# Altium PCB 100x100 SMT Breadboard.PcbDoc
Units mm, origin at the board's own origin, x right, y up, seen from the top; angles counter-clockwise.
Board outline 100 x 100 mm, 2 copper layers (Top Layer, Bottom Layer); 144 components, 0 nets, 576 pads, 0 vias.
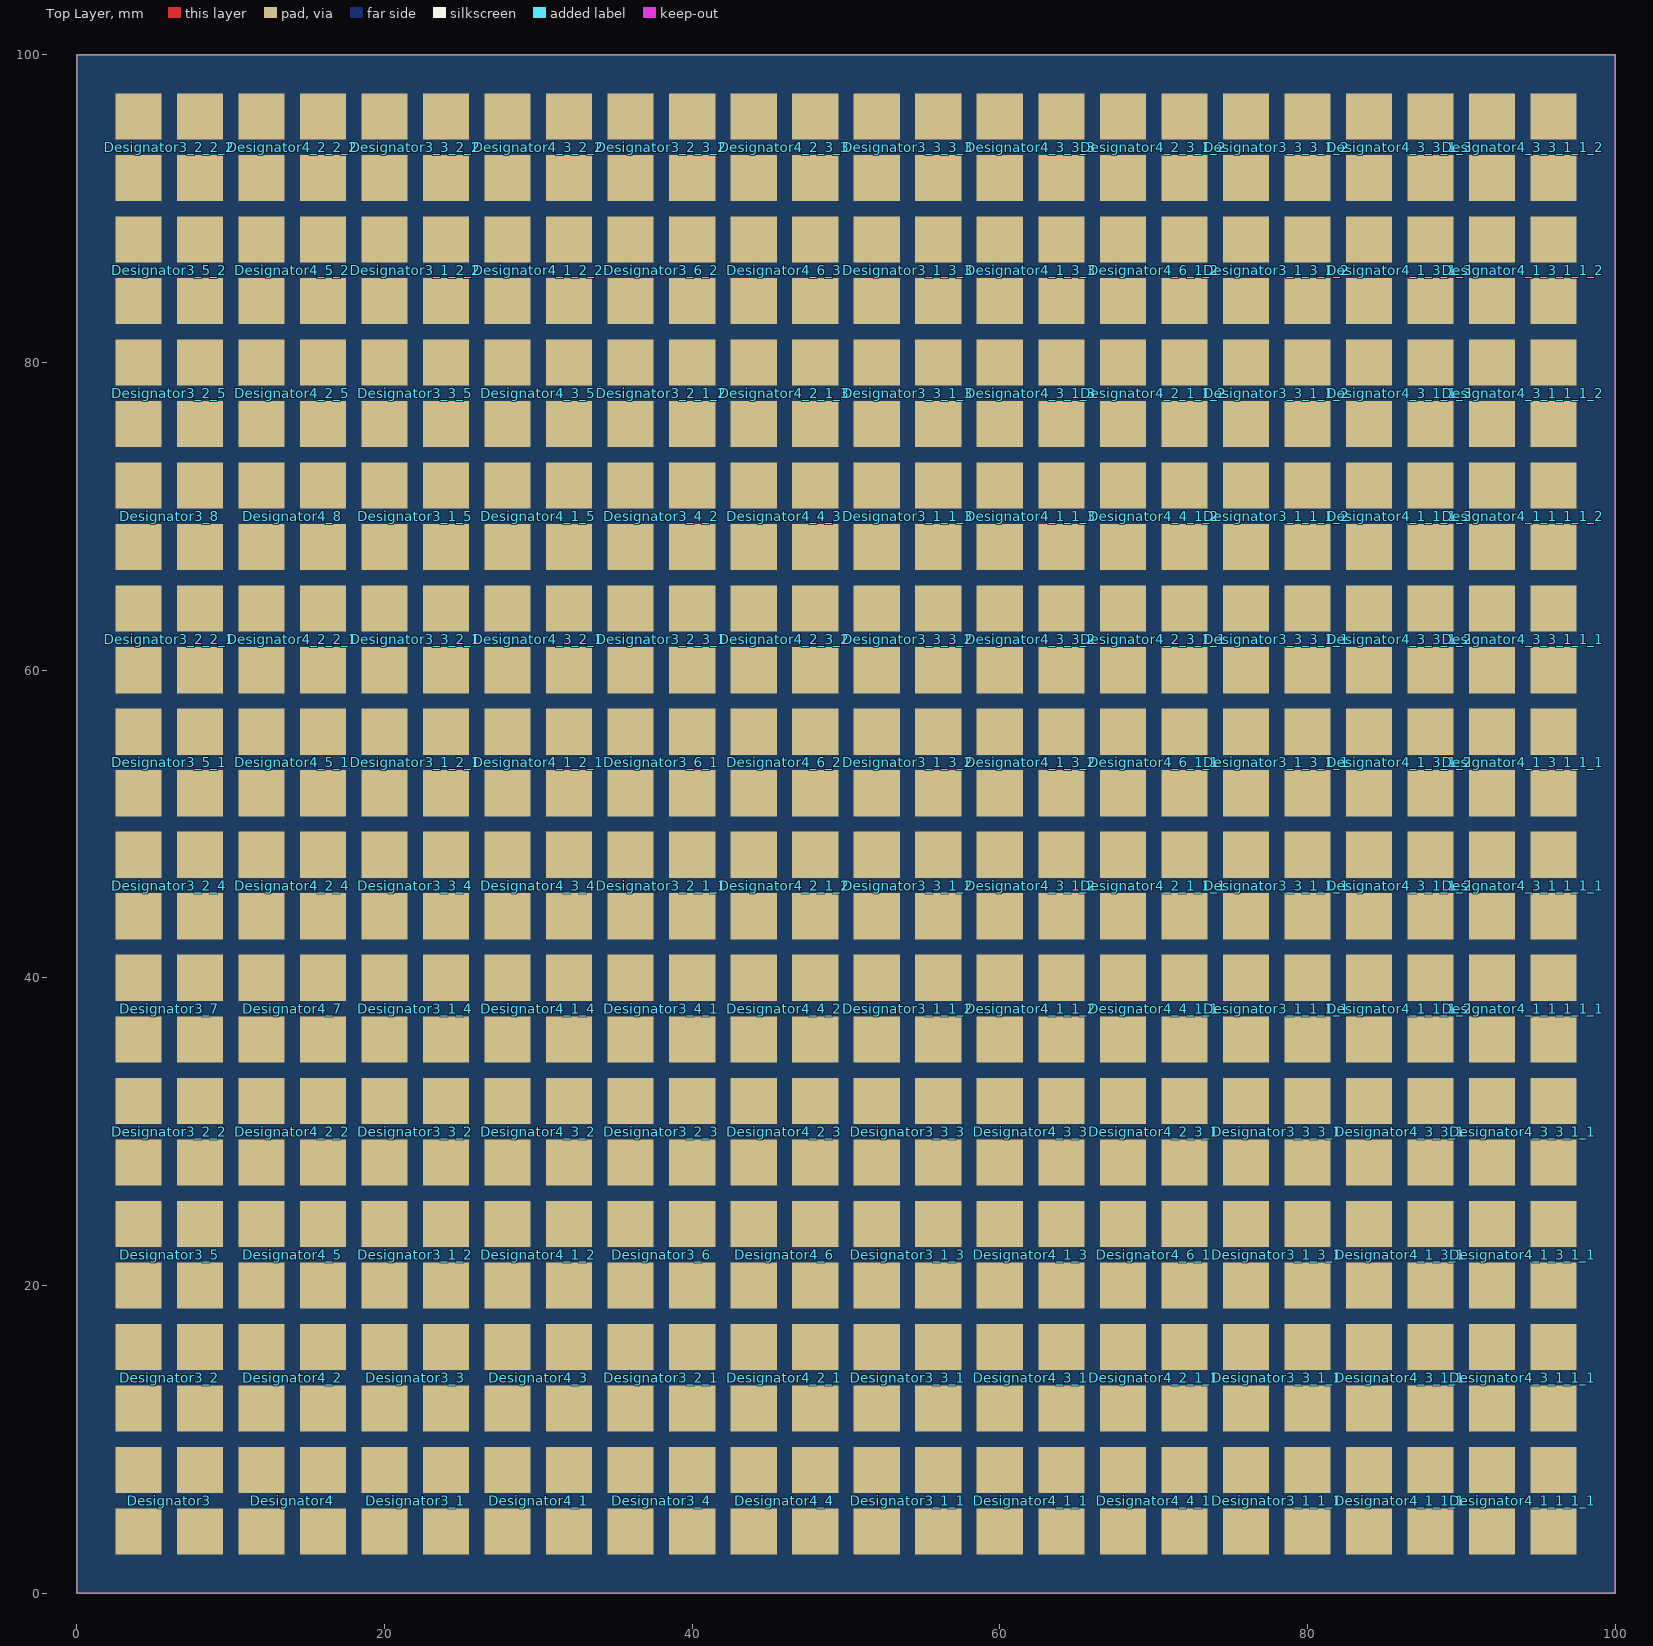
[diagram p0: Top Layer view]
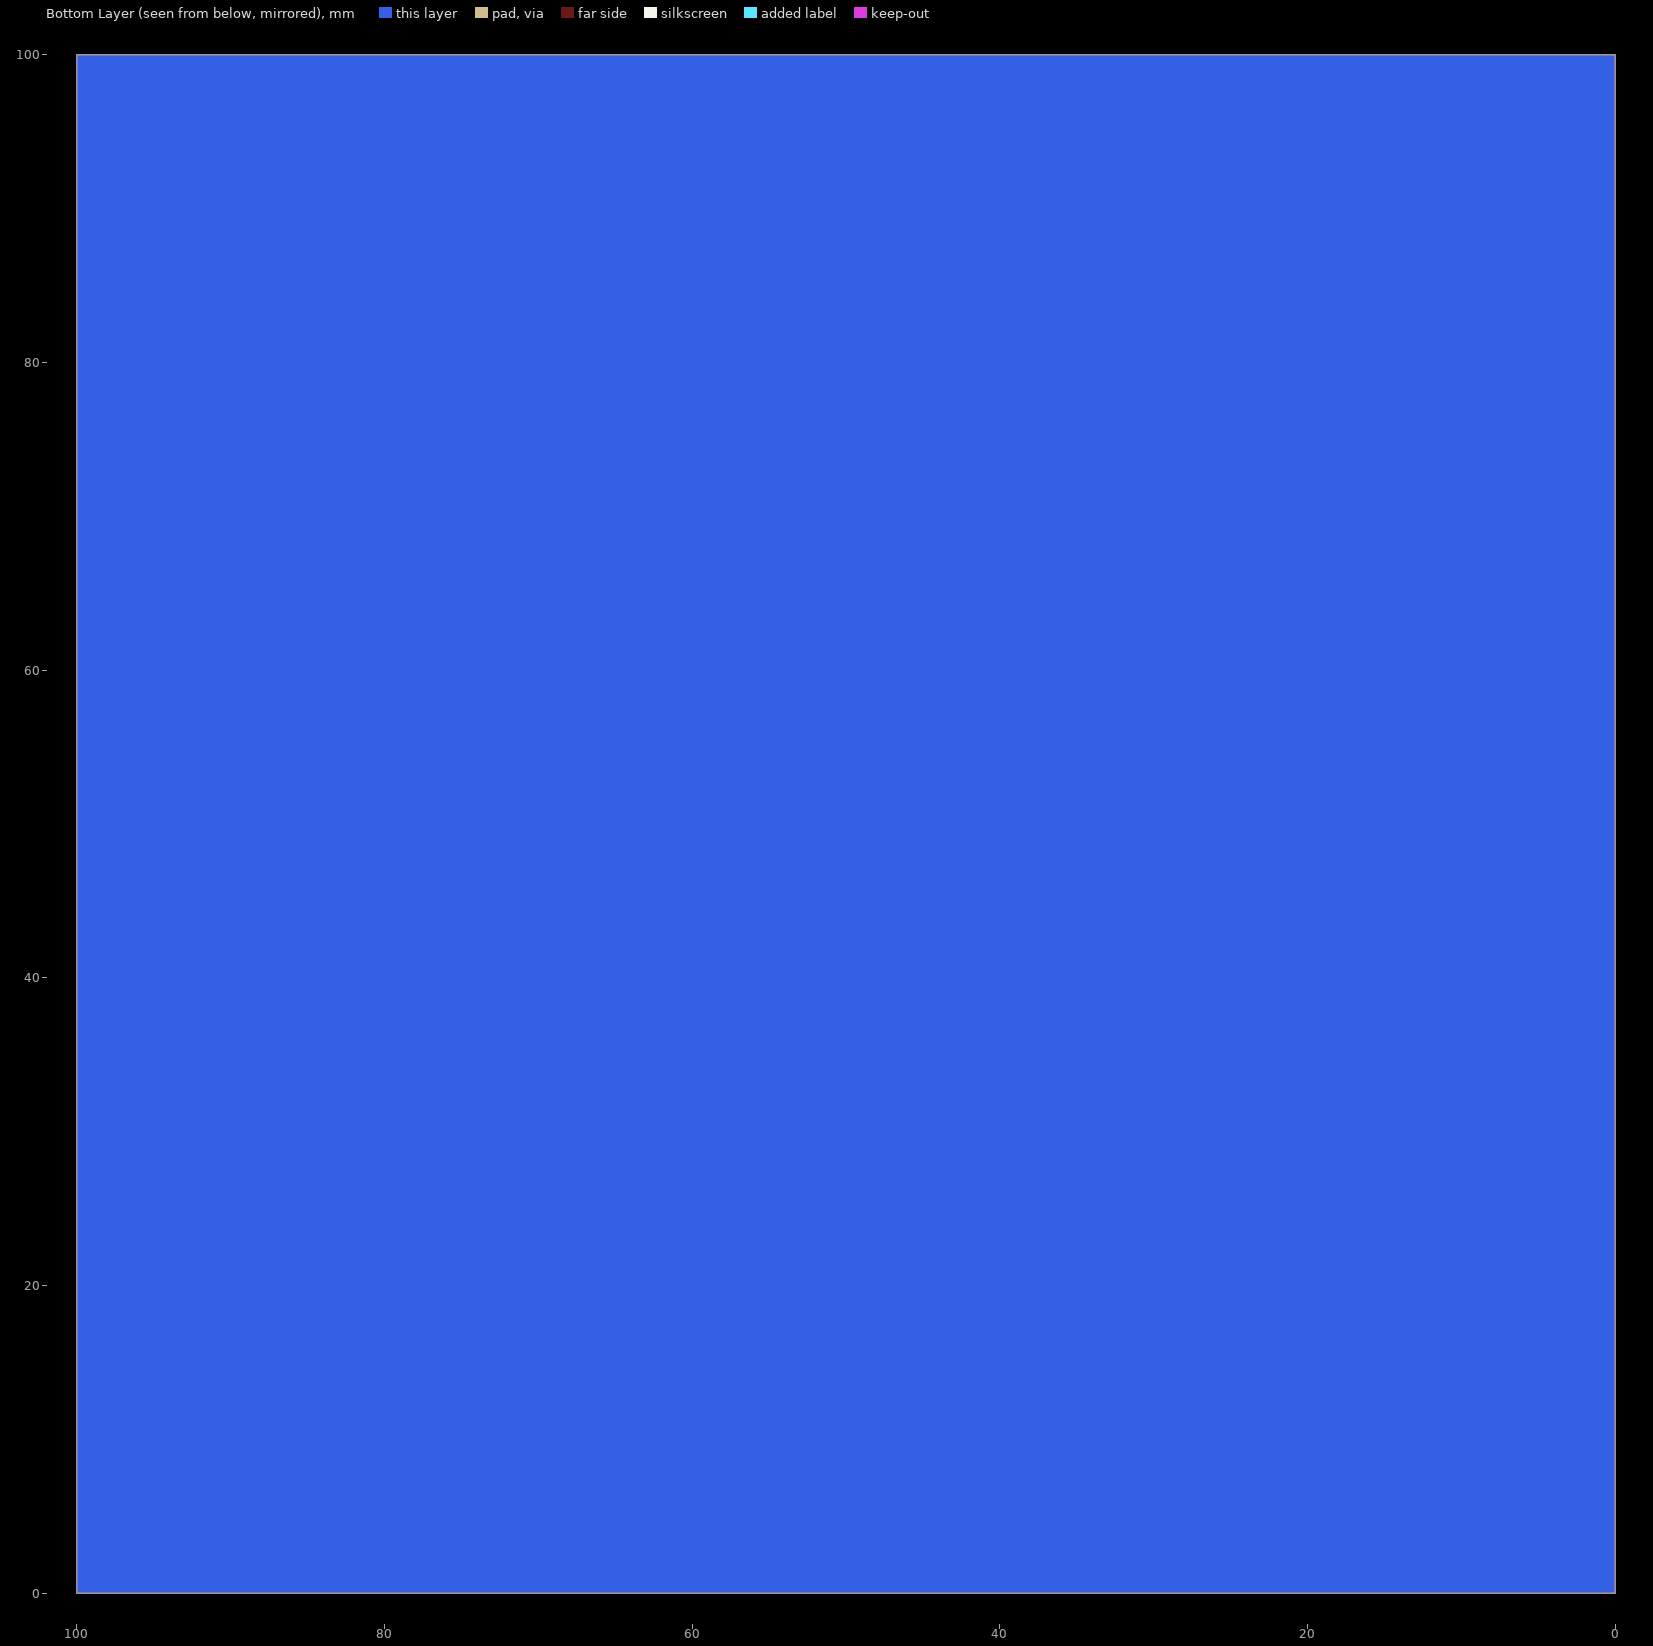
[diagram p1: Bottom Layer view, seen from below]

## Layer stack, top to bottom
Top Solder: solder mask 0.0102, Solder Resist, Dk 3.5
Top Layer: signal copper 0.0356
Dielectric 1: dielectric 0.32, FR-4, Dk 4.8
Bottom Layer: signal copper 0.0356
Bottom Solder: solder mask 0.0102, Solder Resist, Dk 3.5

## Board outline
0,0 100,0 100,100 0,100

## Design rules (kind name [scope] priority, off if disabled: settings)
Clearance [All] p1: gap=0.254
PolygonConnect [All] p1: connectstyle=Relief reliefconductorwidth=0.254 reliefentries=4 polygonreliefangle="90 Angle" airgapwidth=0.254
RoutingVias [All] p1: holewidth=0.711 width=1.27 viastyle="Through Hole" minholewidth=0.711 minwidth=1.27 maxholewidth=0.711 maxwidth=1.27
SolderMaskExpansion [All] p1: expansion=0.102
Width [All] p1: maxlimit=0.254 minlimit=0.254 preferedwidth=0.254
30 further rules are at their usual default settings.

## Components (designator, comment, footprint, x,y, rotation, side; value= is the part's Value field where it differs from the comment)
Designator3 "Comment" "SMD Breadboard" 6,6 r0 top
Designator3_1 "Comment" "SMD Breadboard" 22,6 r0 top
Designator3_1_1 "Comment" "SMD Breadboard" 54,6 r0 top
Designator3_1_1_1 "Comment" "SMD Breadboard" 78,6 r0 top
Designator3_1_1_1_1 "Comment" "SMD Breadboard" 78,38 r0 top
Designator3_1_1_1_2 "Comment" "SMD Breadboard" 78,70 r0 top
Designator3_1_1_2 "Comment" "SMD Breadboard" 54,38 r0 top
Designator3_1_1_3 "Comment" "SMD Breadboard" 54,70 r0 top
Designator3_1_2 "Comment" "SMD Breadboard" 22,22 r0 top
Designator3_1_2_1 "Comment" "SMD Breadboard" 22,54 r0 top
Designator3_1_2_2 "Comment" "SMD Breadboard" 22,86 r0 top
Designator3_1_3 "Comment" "SMD Breadboard" 54,22 r0 top
Designator3_1_3_1 "Comment" "SMD Breadboard" 78,22 r0 top
Designator3_1_3_1_1 "Comment" "SMD Breadboard" 78,54 r0 top
Designator3_1_3_1_2 "Comment" "SMD Breadboard" 78,86 r0 top
Designator3_1_3_2 "Comment" "SMD Breadboard" 54,54 r0 top
Designator3_1_3_3 "Comment" "SMD Breadboard" 54,86 r0 top
Designator3_1_4 "Comment" "SMD Breadboard" 22,38 r0 top
Designator3_1_5 "Comment" "SMD Breadboard" 22,70 r0 top
Designator3_2 "Comment" "SMD Breadboard" 6,14 r0 top
Designator3_2_1 "Comment" "SMD Breadboard" 38,14 r0 top
Designator3_2_1_1 "Comment" "SMD Breadboard" 38,46 r0 top
Designator3_2_1_2 "Comment" "SMD Breadboard" 38,78 r0 top
Designator3_2_2 "Comment" "SMD Breadboard" 6,30 r0 top
Designator3_2_2_1 "Comment" "SMD Breadboard" 6,62 r0 top
Designator3_2_2_2 "Comment" "SMD Breadboard" 6,94 r0 top
Designator3_2_3 "Comment" "SMD Breadboard" 38,30 r0 top
Designator3_2_3_1 "Comment" "SMD Breadboard" 38,62 r0 top
Designator3_2_3_2 "Comment" "SMD Breadboard" 38,94 r0 top
Designator3_2_4 "Comment" "SMD Breadboard" 6,46 r0 top
Designator3_2_5 "Comment" "SMD Breadboard" 6,78 r0 top
Designator3_3 "Comment" "SMD Breadboard" 22,14 r0 top
Designator3_3_1 "Comment" "SMD Breadboard" 54,14 r0 top
Designator3_3_1_1 "Comment" "SMD Breadboard" 78,14 r0 top
Designator3_3_1_1_1 "Comment" "SMD Breadboard" 78,46 r0 top
Designator3_3_1_1_2 "Comment" "SMD Breadboard" 78,78 r0 top
Designator3_3_1_2 "Comment" "SMD Breadboard" 54,46 r0 top
Designator3_3_1_3 "Comment" "SMD Breadboard" 54,78 r0 top
Designator3_3_2 "Comment" "SMD Breadboard" 22,30 r0 top
Designator3_3_2_1 "Comment" "SMD Breadboard" 22,62 r0 top
Designator3_3_2_2 "Comment" "SMD Breadboard" 22,94 r0 top
Designator3_3_3 "Comment" "SMD Breadboard" 54,30 r0 top
Designator3_3_3_1 "Comment" "SMD Breadboard" 78,30 r0 top
Designator3_3_3_1_1 "Comment" "SMD Breadboard" 78,62 r0 top
Designator3_3_3_1_2 "Comment" "SMD Breadboard" 78,94 r0 top
Designator3_3_3_2 "Comment" "SMD Breadboard" 54,62 r0 top
Designator3_3_3_3 "Comment" "SMD Breadboard" 54,94 r0 top
Designator3_3_4 "Comment" "SMD Breadboard" 22,46 r0 top
Designator3_3_5 "Comment" "SMD Breadboard" 22,78 r0 top
Designator3_4 "Comment" "SMD Breadboard" 38,6 r0 top
Designator3_4_1 "Comment" "SMD Breadboard" 38,38 r0 top
Designator3_4_2 "Comment" "SMD Breadboard" 38,70 r0 top
Designator3_5 "Comment" "SMD Breadboard" 6,22 r0 top
Designator3_5_1 "Comment" "SMD Breadboard" 6,54 r0 top
Designator3_5_2 "Comment" "SMD Breadboard" 6,86 r0 top
Designator3_6 "Comment" "SMD Breadboard" 38,22 r0 top
Designator3_6_1 "Comment" "SMD Breadboard" 38,54 r0 top
Designator3_6_2 "Comment" "SMD Breadboard" 38,86 r0 top
Designator3_7 "Comment" "SMD Breadboard" 6,38 r0 top
Designator3_8 "Comment" "SMD Breadboard" 6,70 r0 top
Designator4 "Comment" "SMD Breadboard" 14,6 r0 top
Designator4_1 "Comment" "SMD Breadboard" 30,6 r0 top
Designator4_1_1 "Comment" "SMD Breadboard" 62,6 r0 top
Designator4_1_1_1 "Comment" "SMD Breadboard" 86,6 r0 top
Designator4_1_1_1_1 "Comment" "SMD Breadboard" 94,6 r0 top
Designator4_1_1_1_1_1 "Comment" "SMD Breadboard" 94,38 r0 top
Designator4_1_1_1_1_2 "Comment" "SMD Breadboard" 94,70 r0 top
Designator4_1_1_1_2 "Comment" "SMD Breadboard" 86,38 r0 top
Designator4_1_1_1_3 "Comment" "SMD Breadboard" 86,70 r0 top
Designator4_1_1_2 "Comment" "SMD Breadboard" 62,38 r0 top
Designator4_1_1_3 "Comment" "SMD Breadboard" 62,70 r0 top
Designator4_1_2 "Comment" "SMD Breadboard" 30,22 r0 top
Designator4_1_2_1 "Comment" "SMD Breadboard" 30,54 r0 top
Designator4_1_2_2 "Comment" "SMD Breadboard" 30,86 r0 top
Designator4_1_3 "Comment" "SMD Breadboard" 62,22 r0 top
Designator4_1_3_1 "Comment" "SMD Breadboard" 86,22 r0 top
Designator4_1_3_1_1 "Comment" "SMD Breadboard" 94,22 r0 top
Designator4_1_3_1_1_1 "Comment" "SMD Breadboard" 94,54 r0 top
Designator4_1_3_1_1_2 "Comment" "SMD Breadboard" 94,86 r0 top
Designator4_1_3_1_2 "Comment" "SMD Breadboard" 86,54 r0 top
Designator4_1_3_1_3 "Comment" "SMD Breadboard" 86,86 r0 top
Designator4_1_3_2 "Comment" "SMD Breadboard" 62,54 r0 top
Designator4_1_3_3 "Comment" "SMD Breadboard" 62,86 r0 top
Designator4_1_4 "Comment" "SMD Breadboard" 30,38 r0 top
Designator4_1_5 "Comment" "SMD Breadboard" 30,70 r0 top
Designator4_2 "Comment" "SMD Breadboard" 14,14 r0 top
Designator4_2_1 "Comment" "SMD Breadboard" 46,14 r0 top
Designator4_2_1_1 "Comment" "SMD Breadboard" 70,14 r0 top
Designator4_2_1_1_1 "Comment" "SMD Breadboard" 70,46 r0 top
Designator4_2_1_1_2 "Comment" "SMD Breadboard" 70,78 r0 top
Designator4_2_1_2 "Comment" "SMD Breadboard" 46,46 r0 top
Designator4_2_1_3 "Comment" "SMD Breadboard" 46,78 r0 top
Designator4_2_2 "Comment" "SMD Breadboard" 14,30 r0 top
Designator4_2_2_1 "Comment" "SMD Breadboard" 14,62 r0 top
Designator4_2_2_2 "Comment" "SMD Breadboard" 14,94 r0 top
Designator4_2_3 "Comment" "SMD Breadboard" 46,30 r0 top
Designator4_2_3_1 "Comment" "SMD Breadboard" 70,30 r0 top
Designator4_2_3_1_1 "Comment" "SMD Breadboard" 70,62 r0 top
Designator4_2_3_1_2 "Comment" "SMD Breadboard" 70,94 r0 top
Designator4_2_3_2 "Comment" "SMD Breadboard" 46,62 r0 top
Designator4_2_3_3 "Comment" "SMD Breadboard" 46,94 r0 top
Designator4_2_4 "Comment" "SMD Breadboard" 14,46 r0 top
Designator4_2_5 "Comment" "SMD Breadboard" 14,78 r0 top
Designator4_3 "Comment" "SMD Breadboard" 30,14 r0 top
Designator4_3_1 "Comment" "SMD Breadboard" 62,14 r0 top
Designator4_3_1_1 "Comment" "SMD Breadboard" 86,14 r0 top
Designator4_3_1_1_1 "Comment" "SMD Breadboard" 94,14 r0 top
Designator4_3_1_1_1_1 "Comment" "SMD Breadboard" 94,46 r0 top
Designator4_3_1_1_1_2 "Comment" "SMD Breadboard" 94,78 r0 top
Designator4_3_1_1_2 "Comment" "SMD Breadboard" 86,46 r0 top
Designator4_3_1_1_3 "Comment" "SMD Breadboard" 86,78 r0 top
Designator4_3_1_2 "Comment" "SMD Breadboard" 62,46 r0 top
Designator4_3_1_3 "Comment" "SMD Breadboard" 62,78 r0 top
Designator4_3_2 "Comment" "SMD Breadboard" 30,30 r0 top
Designator4_3_2_1 "Comment" "SMD Breadboard" 30,62 r0 top
Designator4_3_2_2 "Comment" "SMD Breadboard" 30,94 r0 top
Designator4_3_3 "Comment" "SMD Breadboard" 62,30 r0 top
Designator4_3_3_1 "Comment" "SMD Breadboard" 86,30 r0 top
Designator4_3_3_1_1 "Comment" "SMD Breadboard" 94,30 r0 top
Designator4_3_3_1_1_1 "Comment" "SMD Breadboard" 94,62 r0 top
Designator4_3_3_1_1_2 "Comment" "SMD Breadboard" 94,94 r0 top
Designator4_3_3_1_2 "Comment" "SMD Breadboard" 86,62 r0 top
Designator4_3_3_1_3 "Comment" "SMD Breadboard" 86,94 r0 top
Designator4_3_3_2 "Comment" "SMD Breadboard" 62,62 r0 top
Designator4_3_3_3 "Comment" "SMD Breadboard" 62,94 r0 top
Designator4_3_4 "Comment" "SMD Breadboard" 30,46 r0 top
Designator4_3_5 "Comment" "SMD Breadboard" 30,78 r0 top
Designator4_4 "Comment" "SMD Breadboard" 46,6 r0 top
Designator4_4_1 "Comment" "SMD Breadboard" 70,6 r0 top
Designator4_4_1_1 "Comment" "SMD Breadboard" 70,38 r0 top
Designator4_4_1_2 "Comment" "SMD Breadboard" 70,70 r0 top
Designator4_4_2 "Comment" "SMD Breadboard" 46,38 r0 top
Designator4_4_3 "Comment" "SMD Breadboard" 46,70 r0 top
Designator4_5 "Comment" "SMD Breadboard" 14,22 r0 top
Designator4_5_1 "Comment" "SMD Breadboard" 14,54 r0 top
Designator4_5_2 "Comment" "SMD Breadboard" 14,86 r0 top
Designator4_6 "Comment" "SMD Breadboard" 46,22 r0 top
Designator4_6_1 "Comment" "SMD Breadboard" 70,22 r0 top
Designator4_6_1_1 "Comment" "SMD Breadboard" 70,54 r0 top
Designator4_6_1_2 "Comment" "SMD Breadboard" 70,86 r0 top
Designator4_6_2 "Comment" "SMD Breadboard" 46,54 r0 top
Designator4_6_3 "Comment" "SMD Breadboard" 46,86 r0 top
Designator4_7 "Comment" "SMD Breadboard" 14,38 r0 top
Designator4_8 "Comment" "SMD Breadboard" 14,70 r0 top

## Footprints (in the part's own frame and the unit in brackets; to place one, negate y for a bottom-side part, rotate by r counter-clockwise, add the part's x,y. Pads: shape width x height; smd on the part's side, far side on the other; paste and mask are expansions set on the pad)
"SMD Breadboard" [mm] "LCC, 4-Pins, Body 1,7x2,1mm (max), Pitch 1,30mm, IPC High Density"
  rect 3x3 smd: 1(-2,-2) 2(2,-2) 3(-2,2) 4(2,2)

## Nets (pads, with @x,y where several pads share a name; then routed paths per layer and width w, separated by ;. In a path a pad name is that pad's centre, name@x,y a point inside that pad or via, vN(x,y) a via of type N, cw(c..) or ccw(c..) an arc to the next point about the centre after c; other vN are vias at no path point)
pads on no net: Designator3.1 Designator3.2 Designator3.3 Designator3.4 Designator3_1.1 Designator3_1.2 Designator3_1.3 Designator3_1.4 Designator3_1_1.1 Designator3_1_1.2 Designator3_1_1.3 Designator3_1_1.4 Designator3_1_1_1.1 Designator3_1_1_1.2 Designator3_1_1_1.3 Designator3_1_1_1.4 Designator3_1_1_1_1.1 Designator3_1_1_1_1.2 Designator3_1_1_1_1.3 Designator3_1_1_1_1.4 Designator3_1_1_1_2.1 Designator3_1_1_1_2.2 Designator3_1_1_1_2.3 Designator3_1_1_1_2.4 Designator3_1_1_2.1 Designator3_1_1_2.2 Designator3_1_1_2.3 Designator3_1_1_2.4 Designator3_1_1_3.1 Designator3_1_1_3.2 Designator3_1_1_3.3 Designator3_1_1_3.4 Designator3_1_2.1 Designator3_1_2.2 Designator3_1_2.3 Designator3_1_2.4 Designator3_1_2_1.1 Designator3_1_2_1.2 Designator3_1_2_1.3 Designator3_1_2_1.4 Designator3_1_2_2.1 Designator3_1_2_2.2 Designator3_1_2_2.3 Designator3_1_2_2.4 Designator3_1_3.1 Designator3_1_3.2 Designator3_1_3.3 Designator3_1_3.4 Designator3_1_3_1.1 Designator3_1_3_1.2 Designator3_1_3_1.3 Designator3_1_3_1.4 Designator3_1_3_1_1.1 Designator3_1_3_1_1.2 Designator3_1_3_1_1.3 Designator3_1_3_1_1.4 Designator3_1_3_1_2.1 Designator3_1_3_1_2.2 Designator3_1_3_1_2.3 Designator3_1_3_1_2.4 Designator3_1_3_2.1 Designator3_1_3_2.2 Designator3_1_3_2.3 Designator3_1_3_2.4 Designator3_1_3_3.1 Designator3_1_3_3.2 Designator3_1_3_3.3 Designator3_1_3_3.4 Designator3_1_4.1 Designator3_1_4.2 Designator3_1_4.3 Designator3_1_4.4 Designator3_1_5.1 Designator3_1_5.2 Designator3_1_5.3 Designator3_1_5.4 Designator3_2.1 Designator3_2.2 Designator3_2.3 Designator3_2.4 Designator3_2_1.1 Designator3_2_1.2 Designator3_2_1.3 Designator3_2_1.4 Designator3_2_1_1.1 Designator3_2_1_1.2 Designator3_2_1_1.3 Designator3_2_1_1.4 Designator3_2_1_2.1 Designator3_2_1_2.2 Designator3_2_1_2.3 Designator3_2_1_2.4 Designator3_2_2.1 Designator3_2_2.2 Designator3_2_2.3 Designator3_2_2.4 Designator3_2_2_1.1 Designator3_2_2_1.2 Designator3_2_2_1.3 Designator3_2_2_1.4 Designator3_2_2_2.1 Designator3_2_2_2.2 Designator3_2_2_2.3 Designator3_2_2_2.4 Designator3_2_3.1 Designator3_2_3.2 Designator3_2_3.3 Designator3_2_3.4 Designator3_2_3_1.1 Designator3_2_3_1.2 Designator3_2_3_1.3 Designator3_2_3_1.4 Designator3_2_3_2.1 Designator3_2_3_2.2 Designator3_2_3_2.3 Designator3_2_3_2.4 Designator3_2_4.1 Designator3_2_4.2 Designator3_2_4.3 Designator3_2_4.4 Designator3_2_5.1 Designator3_2_5.2 Designator3_2_5.3 Designator3_2_5.4 Designator3_3.1 Designator3_3.2 Designator3_3.3 Designator3_3.4 Designator3_3_1.1 Designator3_3_1.2 Designator3_3_1.3 Designator3_3_1.4 Designator3_3_1_1.1 Designator3_3_1_1.2 Designator3_3_1_1.3 Designator3_3_1_1.4 Designator3_3_1_1_1.1 Designator3_3_1_1_1.2 Designator3_3_1_1_1.3 Designator3_3_1_1_1.4 Designator3_3_1_1_2.1 Designator3_3_1_1_2.2 Designator3_3_1_1_2.3 Designator3_3_1_1_2.4 Designator3_3_1_2.1 Designator3_3_1_2.2 Designator3_3_1_2.3 Designator3_3_1_2.4 Designator3_3_1_3.1 Designator3_3_1_3.2 Designator3_3_1_3.3 Designator3_3_1_3.4 Designator3_3_2.1 Designator3_3_2.2 Designator3_3_2.3 Designator3_3_2.4 Designator3_3_2_1.1 Designator3_3_2_1.2 Designator3_3_2_1.3 Designator3_3_2_1.4 Designator3_3_2_2.1 Designator3_3_2_2.2 Designator3_3_2_2.3 Designator3_3_2_2.4 Designator3_3_3.1 Designator3_3_3.2 Designator3_3_3.3 Designator3_3_3.4 Designator3_3_3_1.1 Designator3_3_3_1.2 Designator3_3_3_1.3 Designator3_3_3_1.4 Designator3_3_3_1_1.1 Designator3_3_3_1_1.2 Designator3_3_3_1_1.3 Designator3_3_3_1_1.4 Designator3_3_3_1_2.1 Designator3_3_3_1_2.2 Designator3_3_3_1_2.3 Designator3_3_3_1_2.4 Designator3_3_3_2.1 Designator3_3_3_2.2 Designator3_3_3_2.3 Designator3_3_3_2.4 Designator3_3_3_3.1 Designator3_3_3_3.2 Designator3_3_3_3.3 Designator3_3_3_3.4 Designator3_3_4.1 Designator3_3_4.2 Designator3_3_4.3 Designator3_3_4.4 Designator3_3_5.1 Designator3_3_5.2 Designator3_3_5.3 Designator3_3_5.4 Designator3_4.1 Designator3_4.2 Designator3_4.3 Designator3_4.4 Designator3_4_1.1 Designator3_4_1.2 Designator3_4_1.3 Designator3_4_1.4 Designator3_4_2.1 Designator3_4_2.2 Designator3_4_2.3 Designator3_4_2.4 Designator3_5.1 Designator3_5.2 Designator3_5.3 Designator3_5.4 Designator3_5_1.1 Designator3_5_1.2 Designator3_5_1.3 Designator3_5_1.4 Designator3_5_2.1 Designator3_5_2.2 Designator3_5_2.3 Designator3_5_2.4 Designator3_6.1 Designator3_6.2 Designator3_6.3 Designator3_6.4 Designator3_6_1.1 Designator3_6_1.2 Designator3_6_1.3 Designator3_6_1.4 Designator3_6_2.1 Designator3_6_2.2 Designator3_6_2.3 Designator3_6_2.4 Designator3_7.1 Designator3_7.2 Designator3_7.3 Designator3_7.4 Designator3_8.1 Designator3_8.2 Designator3_8.3 Designator3_8.4 Designator4.1 Designator4.2 Designator4.3 Designator4.4 Designator4_1.1 Designator4_1.2 Designator4_1.3 Designator4_1.4 Designator4_1_1.1 Designator4_1_1.2 Designator4_1_1.3 Designator4_1_1.4 Designator4_1_1_1.1 Designator4_1_1_1.2 Designator4_1_1_1.3 Designator4_1_1_1.4 Designator4_1_1_1_1.1 Designator4_1_1_1_1.2 Designator4_1_1_1_1.3 Designator4_1_1_1_1.4 Designator4_1_1_1_1_1.1 Designator4_1_1_1_1_1.2 Designator4_1_1_1_1_1.3 Designator4_1_1_1_1_1.4 Designator4_1_1_1_1_2.1 Designator4_1_1_1_1_2.2 Designator4_1_1_1_1_2.3 Designator4_1_1_1_1_2.4 Designator4_1_1_1_2.1 Designator4_1_1_1_2.2 Designator4_1_1_1_2.3 Designator4_1_1_1_2.4 Designator4_1_1_1_3.1 Designator4_1_1_1_3.2 Designator4_1_1_1_3.3 Designator4_1_1_1_3.4 Designator4_1_1_2.1 Designator4_1_1_2.2 Designator4_1_1_2.3 Designator4_1_1_2.4 Designator4_1_1_3.1 Designator4_1_1_3.2 Designator4_1_1_3.3 Designator4_1_1_3.4 Designator4_1_2.1 Designator4_1_2.2 Designator4_1_2.3 Designator4_1_2.4 Designator4_1_2_1.1 Designator4_1_2_1.2 Designator4_1_2_1.3 Designator4_1_2_1.4 Designator4_1_2_2.1 Designator4_1_2_2.2 Designator4_1_2_2.3 Designator4_1_2_2.4 Designator4_1_3.1 Designator4_1_3.2 Designator4_1_3.3 Designator4_1_3.4 Designator4_1_3_1.1 Designator4_1_3_1.2 Designator4_1_3_1.3 Designator4_1_3_1.4 Designator4_1_3_1_1.1 Designator4_1_3_1_1.2 Designator4_1_3_1_1.3 Designator4_1_3_1_1.4 Designator4_1_3_1_1_1.1 Designator4_1_3_1_1_1.2 Designator4_1_3_1_1_1.3 Designator4_1_3_1_1_1.4 Designator4_1_3_1_1_2.1 Designator4_1_3_1_1_2.2 Designator4_1_3_1_1_2.3 Designator4_1_3_1_1_2.4 Designator4_1_3_1_2.1 Designator4_1_3_1_2.2 Designator4_1_3_1_2.3 Designator4_1_3_1_2.4 Designator4_1_3_1_3.1 Designator4_1_3_1_3.2 Designator4_1_3_1_3.3 Designator4_1_3_1_3.4 Designator4_1_3_2.1 Designator4_1_3_2.2 Designator4_1_3_2.3 Designator4_1_3_2.4 Designator4_1_3_3.1 Designator4_1_3_3.2 Designator4_1_3_3.3 Designator4_1_3_3.4 Designator4_1_4.1 Designator4_1_4.2 Designator4_1_4.3 Designator4_1_4.4 Designator4_1_5.1 Designator4_1_5.2 Designator4_1_5.3 Designator4_1_5.4 Designator4_2.1 Designator4_2.2 Designator4_2.3 Designator4_2.4 Designator4_2_1.1 Designator4_2_1.2 Designator4_2_1.3 Designator4_2_1.4 Designator4_2_1_1.1 Designator4_2_1_1.2 Designator4_2_1_1.3 Designator4_2_1_1.4 Designator4_2_1_1_1.1 Designator4_2_1_1_1.2 Designator4_2_1_1_1.3 Designator4_2_1_1_1.4 Designator4_2_1_1_2.1 Designator4_2_1_1_2.2 Designator4_2_1_1_2.3 Designator4_2_1_1_2.4 Designator4_2_1_2.1 Designator4_2_1_2.2 Designator4_2_1_2.3 Designator4_2_1_2.4 Designator4_2_1_3.1 Designator4_2_1_3.2 Designator4_2_1_3.3 Designator4_2_1_3.4 Designator4_2_2.1 Designator4_2_2.2 Designator4_2_2.3 Designator4_2_2.4 Designator4_2_2_1.1 Designator4_2_2_1.2 Designator4_2_2_1.3 Designator4_2_2_1.4 Designator4_2_2_2.1 Designator4_2_2_2.2 Designator4_2_2_2.3 Designator4_2_2_2.4 Designator4_2_3.1 Designator4_2_3.2 Designator4_2_3.3 Designator4_2_3.4 Designator4_2_3_1.1 Designator4_2_3_1.2 Designator4_2_3_1.3 Designator4_2_3_1.4 Designator4_2_3_1_1.1 Designator4_2_3_1_1.2 Designator4_2_3_1_1.3 Designator4_2_3_1_1.4 Designator4_2_3_1_2.1 Designator4_2_3_1_2.2 Designator4_2_3_1_2.3 Designator4_2_3_1_2.4 Designator4_2_3_2.1 Designator4_2_3_2.2 Designator4_2_3_2.3 Designator4_2_3_2.4 Designator4_2_3_3.1 Designator4_2_3_3.2 Designator4_2_3_3.3 Designator4_2_3_3.4 Designator4_2_4.1 Designator4_2_4.2 Designator4_2_4.3 Designator4_2_4.4 Designator4_2_5.1 Designator4_2_5.2 Designator4_2_5.3 Designator4_2_5.4 Designator4_3.1 Designator4_3.2 Designator4_3.3 Designator4_3.4 Designator4_3_1.1 Designator4_3_1.2 Designator4_3_1.3 Designator4_3_1.4 Designator4_3_1_1.1 Designator4_3_1_1.2 Designator4_3_1_1.3 Designator4_3_1_1.4 Designator4_3_1_1_1.1 Designator4_3_1_1_1.2 Designator4_3_1_1_1.3 Designator4_3_1_1_1.4 Designator4_3_1_1_1_1.1 Designator4_3_1_1_1_1.2 Designator4_3_1_1_1_1.3 Designator4_3_1_1_1_1.4 Designator4_3_1_1_1_2.1 Designator4_3_1_1_1_2.2 Designator4_3_1_1_1_2.3 Designator4_3_1_1_1_2.4 Designator4_3_1_1_2.1 Designator4_3_1_1_2.2 Designator4_3_1_1_2.3 Designator4_3_1_1_2.4 Designator4_3_1_1_3.1 Designator4_3_1_1_3.2 Designator4_3_1_1_3.3 Designator4_3_1_1_3.4 Designator4_3_1_2.1 Designator4_3_1_2.2 Designator4_3_1_2.3 Designator4_3_1_2.4 Designator4_3_1_3.1 Designator4_3_1_3.2 Designator4_3_1_3.3 Designator4_3_1_3.4 Designator4_3_2.1 Designator4_3_2.2 Designator4_3_2.3 Designator4_3_2.4 Designator4_3_2_1.1 Designator4_3_2_1.2 Designator4_3_2_1.3 Designator4_3_2_1.4 Designator4_3_2_2.1 Designator4_3_2_2.2 Designator4_3_2_2.3 Designator4_3_2_2.4 Designator4_3_3.1 Designator4_3_3.2 Designator4_3_3.3 Designator4_3_3.4 Designator4_3_3_1.1 Designator4_3_3_1.2 Designator4_3_3_1.3 Designator4_3_3_1.4 Designator4_3_3_1_1.1 Designator4_3_3_1_1.2 Designator4_3_3_1_1.3 Designator4_3_3_1_1.4 Designator4_3_3_1_1_1.1 Designator4_3_3_1_1_1.2 Designator4_3_3_1_1_1.3 Designator4_3_3_1_1_1.4 Designator4_3_3_1_1_2.1 Designator4_3_3_1_1_2.2 Designator4_3_3_1_1_2.3 Designator4_3_3_1_1_2.4 Designator4_3_3_1_2.1 Designator4_3_3_1_2.2 Designator4_3_3_1_2.3 Designator4_3_3_1_2.4 Designator4_3_3_1_3.1 Designator4_3_3_1_3.2 Designator4_3_3_1_3.3 Designator4_3_3_1_3.4 Designator4_3_3_2.1 Designator4_3_3_2.2 Designator4_3_3_2.3 Designator4_3_3_2.4 Designator4_3_3_3.1 Designator4_3_3_3.2 Designator4_3_3_3.3 Designator4_3_3_3.4 Designator4_3_4.1 Designator4_3_4.2 Designator4_3_4.3 Designator4_3_4.4 Designator4_3_5.1 Designator4_3_5.2 Designator4_3_5.3 Designator4_3_5.4 Designator4_4.1 Designator4_4.2 Designator4_4.3 Designator4_4.4 Designator4_4_1.1 Designator4_4_1.2 Designator4_4_1.3 Designator4_4_1.4 Designator4_4_1_1.1 Designator4_4_1_1.2 Designator4_4_1_1.3 Designator4_4_1_1.4 Designator4_4_1_2.1 Designator4_4_1_2.2 Designator4_4_1_2.3 Designator4_4_1_2.4 Designator4_4_2.1 Designator4_4_2.2 Designator4_4_2.3 Designator4_4_2.4 Designator4_4_3.1 Designator4_4_3.2 Designator4_4_3.3 Designator4_4_3.4 Designator4_5.1 Designator4_5.2 Designator4_5.3 Designator4_5.4 Designator4_5_1.1 Designator4_5_1.2 Designator4_5_1.3 Designator4_5_1.4 Designator4_5_2.1 Designator4_5_2.2 Designator4_5_2.3 Designator4_5_2.4 Designator4_6.1 Designator4_6.2 Designator4_6.3 Designator4_6.4 Designator4_6_1.1 Designator4_6_1.2 Designator4_6_1.3 Designator4_6_1.4 Designator4_6_1_1.1 Designator4_6_1_1.2 Designator4_6_1_1.3 Designator4_6_1_1.4 Designator4_6_1_2.1 Designator4_6_1_2.2 Designator4_6_1_2.3 Designator4_6_1_2.4 Designator4_6_2.1 Designator4_6_2.2 Designator4_6_2.3 Designator4_6_2.4 Designator4_6_3.1 Designator4_6_3.2 Designator4_6_3.3 Designator4_6_3.4 Designator4_7.1 Designator4_7.2 Designator4_7.3 Designator4_7.4 Designator4_8.1 Designator4_8.2 Designator4_8.3 Designator4_8.4

## Keep-outs
Keep-Out Layer:
  the board outline again, w0.1

## Other copper
Bottom Layer:
  region: 0,100 100,100 100,0 0,0

## Silkscreen, mask and mechanical layers (free items; w line width, h text height)
Mechanical 29:
  the board outline again, w0.1